# EAGLE board czujnik (EAGLE 9.7.0)
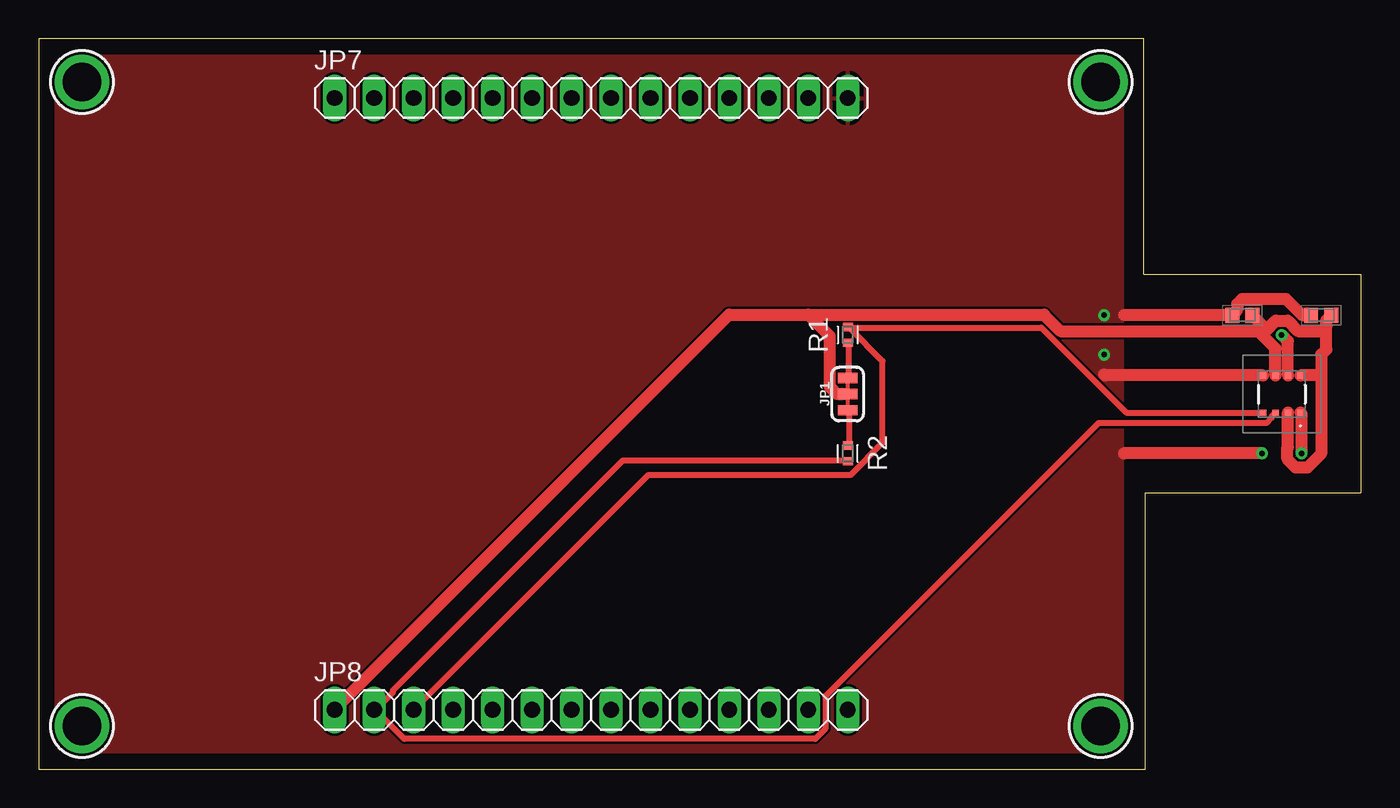
[diagram p0: board, top side]
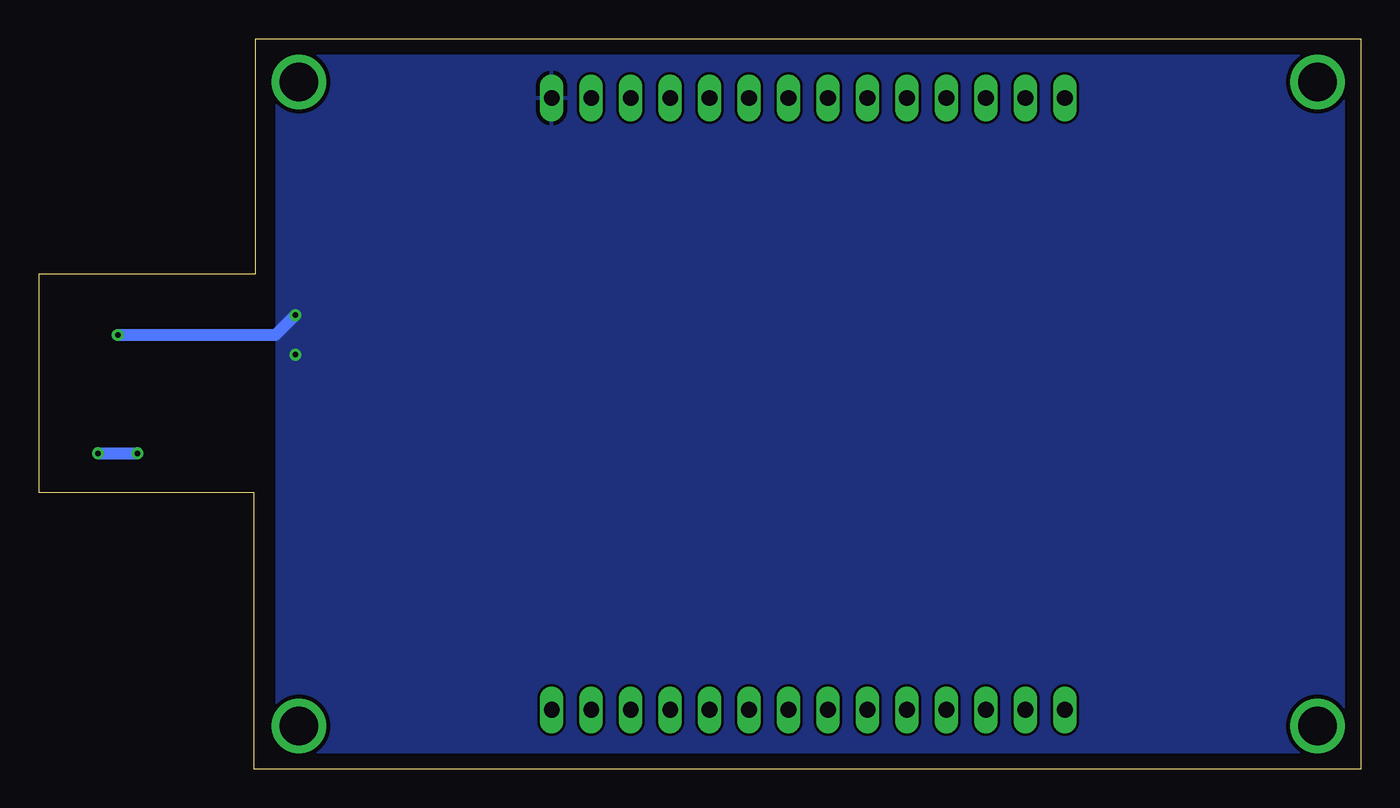
[diagram p1: board, bottom side, seen from below]

Size 85.09 x 46.99 mm. Coordinates in mm from the lower left corner, seen from the top.
Outline: 0,0 71.12,0 71.22,0 71.22,17.78 85.09,17.78 85.09,18.78 85.09,31.67 85.09,31.83 71.12,31.83 71.12,46.99 0,46.99 0,0
Copper layers (1*16): Top 0.035mm / dielectric 1.5mm / Bottom 0.035mm
Design rules "default": minimum track width 6mil, minimum drill 0.35mm, track to track 6mil, track to pad 6mil, pad to pad 6mil, via to via 6mil, smd to smd 6mil, copper to edge 40mil, drill to drill 6mil, minimum pad ring 10mil, minimum via ring 8mil, stop-mask expansion 4mil, vias tented up to drill 0mil, thermal gap 10mil
Net classes: 0 default: width 0.381 mm; 1 power: width 0.711 mm

## Footprints (pad centres in the part's own frame; a part is rotated, then mirrored left to right if it is on the bottom)
BME688 = smd 0.4 x 0.4: 1 1.2,1.2; 2 1.2,0.4; 3 1.2,-0.4; 4 1.2,-1.2; 5 -1.2,-1.2; 6 -1.2,-0.4; 7 -1.2,0.4; 8 -1.2,1.2
CAPC1608X100N = smd 0.89 x 0.98: 1 -0.65,0; 2 0.65,0
SMT-JUMPER_3_2-NC_TRACE_SILK = smd 0.66 x 1.27: 1 -1.041,0; 2 0,0; 3 1.041,0
1X14 = drill 1.016 long: 1 -16.51,0; 2 -13.97,0; 3 -11.43,0; 4 -8.89,0; 5 -6.35,0; 6 -3.81,0; 7 -1.27,0; 8 1.27,0; 9 3.81,0; 10 6.35,0; 11 8.89,0; 12 11.43,0; 13 13.97,0; 14 16.51,0
RESC1005X40 = smd 0.535 x 0.644: 1 -0.507,0; 2 0.507,0
MOUNTINGHOLE_2.5_PLATED = drill 2.5 pad 3.2: P$1 0,0

## Placement (x,y rotation side)
BME688  BME688  [BME688]  80.01,24.13 270 top
C1  C0603X104K1RACTU  [CAPC1608X100N]  82.55,29.21 0 top
C2  C0603X104K1RACTU  [CAPC1608X100N]  77.47,29.21 0 top
JP1  JUMPER-SMT_3_2-NC_TRACE_SILK  [SMT-JUMPER_3_2-NC_TRACE_SILK]  52.07,24.13 90 top
JP7  PINHD-1X14_1X14M  [1X14]  35.56,43.18 0 top
JP8  PINHD-1X14_1X14M  [1X14]  35.56,3.81 0 top
R1  10k  [RESC1005X40]  52.07,27.94 90 top
R2  10k  [RESC1005X40]  52.07,20.32 270 top
U$2  MOUNTINGHOLE2.5  [MOUNTINGHOLE_2.5_PLATED]  2.77,2.77 0 top
U$3  MOUNTINGHOLE2.5  [MOUNTINGHOLE_2.5_PLATED]  68.35,44.22 0 top
U$4  MOUNTINGHOLE2.5  [MOUNTINGHOLE_2.5_PLATED]  68.35,2.77 0 top
U$6  MOUNTINGHOLE2.5  [MOUNTINGHOLE_2.5_PLATED]  2.77,44.22 0 top

## Library data of the parts
BME688 = BME688; DESCRIPTION: Gas sensor measuring relative humidity, barometric pressure, ambient temperature and gas (VOC); HEIGHT: 1mm; MANUFACTURER_NAME: BOSCH; MANUFACTURER_PART_NUMBER: BME688; MOUSER_PART_NUMBER: 262-BME688; MOUSER_PRICE-STOCK: https://www.mouser.co.uk/ProductDetail/Bosch-Sensortec/BME688?qs=IS%252B4QmGtzzqQoVDscqwx3A%3D%3D
C1 C2 = C0603X104K1RACTU; DESCRIPTION: 100 nF; HEIGHT: 1mm; MANUFACTURER_NAME: KEMET; MANUFACTURER_PART_NUMBER: C0603X104K1RACTU; MOUSER_PART_NUMBER: 80-C0603X104K1RACTU; MOUSER_PRICE-STOCK: https://www.mouser.co.uk/ProductDetail/KEMET/C0603X104K1RACTU?qs=ZcfC38r4PovU2DcqPY0qJg%3D%3D
JP1 = SparkFun-Jumpers
JP7 JP8 = Tinkercad
R1 R2 = Tinkercad; CATEGORY: Resistor; SUB-CATEGORY: Fixed
U$2-U$4 U$6 = microbuilder; BOM: EXCLUDE

## Nets
3V3 [power]: BME688.2 BME688.6 BME688.8 C1.2 C2.2 JP1.2 JP8.1
GND [power]: BME688.1 BME688.5 BME688.7 C1.1 C2.1 JP7.14
N$2: JP1.1 R2.1
N$3: JP1.3 R1.1
SCL: BME688.4 JP8.3 R1.2
SDA: BME688.3 JP8.2 R2.2

## Tracks (layer width: path | path; a pad name or v marks a point on that pad's centre or on a via)
3V3
  Top 0.762: 82.88,28.5 82.57,28.19 81.05,28.19 80.39,28.85 79.63,28.85 78.97,28.19 78.74,28.19 | 82.88,28.5 82.88,28.89 C1.2 | C2.2 78.74,28.59 78.74,28.19 | 82.88,28.5 82.88,27 82.55,26.67 82.55,25.4 | BME688.2 80.41,20.74 80.37,20.7 80.37,19.94 80.9,19.41 81.66,19.41 82.55,20.3 82.55,25.4 | JP8.1 19.07,3.83 19.07,3.88 44.43,29.25 49.53,29.25 | 78.74,28.19 65.77,28.19 64.71,29.25 49.53,29.25 | 50.9,24.62 51.21,24.31 | 49.53,29.25 50.9,27.88 50.9,24.62 | BME688.6 79.61,27.07 78.74,27.94 78.74,28.19 | JP1.2 51.39,24.13 50.9,24.62 | 82.55,25.4 82.48,25.33 BME688.8
GND  (via drill 0.35)
  Top 0.762: C1.1 81.32,29.21 80.3,30.23 77.45,30.23 77.14,29.92 77.14,29.53 C2.1 71.12,29.21 69.85,29.21 | BME688.1 81.28,22.86 v81.28,20.32 | v78.74,20.32 69.85,20.32 | v80.01,27.94 80.41,27.54 BME688.7 | BME688.5 68.65,25.33 68.58,25.4
  Bottom 0.762: v81.28,20.32 v78.74,20.32 | v80.01,27.94 69.85,27.94 v68.58,29.21
  other vias: 68.58,26.67
  pour Top: 0.08,0.08 69.77,0.08 69.77,46.91 0.08,46.91
  pour Bottom: 0.08,0.08 69.77,0.08 69.77,46.91 0.08,46.91
N$2
  Top 0.381: R2.1 52.14,20.94 52.14,23.07 JP1.1
N$3
  Top 0.381: R1.1 52.14,27.34 52.14,25.2 JP1.3
SCL
  Top 0.381: 52.14,28.4 R1.2 | 52.14,28.4 64.53,28.4 70,22.93 BME688.4 | 52.14,28.4 52.17,28.4 54.32,26.26 54.32,20.99 52.27,18.94 39.26,18.94 JP8.3
SDA
  Top 0.381: R2.2 52.01,19.87 37.6,19.87 22.8,5.07 22.8,4.93 21.74,3.87 JP8.2 21.66,3.81 23.53,1.94 49.99,1.94 50.63,2.59 50.63,4.7 68.2,22.27 79.03,22.27 79.35,22.59 79.35,22.67 BME688.3